# Altium PCB DQLA-Q.PcbDoc (part 2 of 2)
Units mil, origin at the board's own origin, x right, y up, seen from the top; angles counter-clockwise.
Board outline 12390.02 x 2400.02 mil, 6 copper layers (Top Layer, Plane 1, Signal 1, Signal 2, Plane 2, Bottom Layer), stack 32.112 mil thick; 112 components, 227 nets, 639 pads, 315 vias.
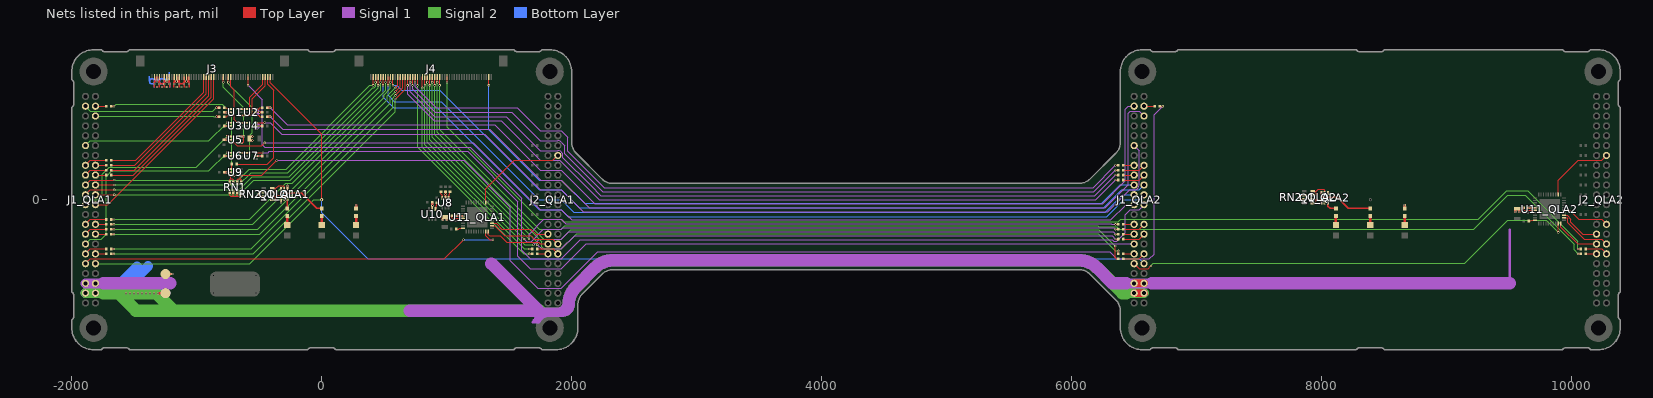
[diagram p6: the nets of this part, all layers, seen from the top]

## Via types
v1: diameter 18, hole 8, Top Layer to Bottom Layer, tented both sides, 315 vias

## Nets (pads, with @x,y where several pads share a name; then routed paths per layer and width w, separated by ;. In a path a pad name is that pad's centre, name@x,y a point inside that pad or via, vN(x,y) a via of type N, cw(c..) or ccw(c..) an arc to the next point about the centre after c; other vN are vias at no path point) (continued)
LIM-N3_QLA2: J2_QLA2.27 U11_QLA2.15 | length 384.8
  Top Layer w6: U11_QLA2.15@9941,-84.84 9984.84,-84.84 10057.48,-157.48 10240,-157.48 J2_QLA2.27@10279.37,-196.85
LIM-N4_QLA1: J2_QLA1.30 U11_QLA1.13 | length 485.4
  Top Layer w6: U11_QLA1.13@1361,-189.21 1395,-189.21 1440.79,-235 1674.41,-235 1715,-275.59 J2_QLA1.30@1810.63,-275.59
LIM-N4_QLA2: J2_QLA2.30 U11_QLA2.13 | length 336.8
  Top Layer w6: U11_QLA2.13@9941,-124.21 9963.9,-124.21 9995,-155.32 9995,-180 10090.59,-275.59 J2_QLA2.30@10200.63,-275.59
LIM-P1_QLA1: J2_QLA1.31 U11_QLA1.12 | length 588.6
  Top Layer w6: U11_QLA1.12@1361,-208.9 1385,-208.9 1466.1,-290 1675.04,-290 1700,-314.96 1850,-314.96 J2_QLA1.31@1889.37,-354.33
LIM-P1_QLA2: J2_QLA2.31 U11_QLA2.12 | length 446
  Top Layer w6: U11_QLA2.12@9941,-143.9 9963.9,-143.9 9970,-150 9970,-185 10099.96,-314.96 10240,-314.96 J2_QLA2.31@10279.37,-354.33
LIM-P2_QLA1: J2_QLA1.32 U11_QLA1.10 | length 531.8
  Top Layer w6: U11_QLA1.10@1333.58,-256 1333.58,-280 1343.58,-290 1430,-290 1480,-340 1735,-340 1749.33,-354.33 J2_QLA1.32@1810.63,-354.33
LIM-P2_QLA2: J2_QLA2.32 U11_QLA2.10 | length 371.6
  Top Layer w6: U11_QLA2.10@9913.58,-191 9913.58,-219.79 10048.12,-354.33 J2_QLA2.32@10200.63,-354.33
LIM-P3#_QLA1: J2_QLA1.33 R28_QLA1.1 | length 180.7
  Top Layer w8: R28_QLA1.1@1725,-393.7 1850,-393.7 J2_QLA1.33@1889.37,-433.07
LIM-P3#_QLA2: J2_QLA2.33 R28_QLA2.1 | length 180.7
  Top Layer w8: R28_QLA2.1@10115,-393.7 10240,-393.7 J2_QLA2.33@10279.37,-433.07
LIM-P3_QLA1: J4.29 R28_QLA1.2 | length 1779.1
  Top Layer w8: v1@806.1,900 J4.29@806.1,982.5 ; v1(1660.94,-393.7) R28_QLA1.2@1685,-393.7
  Signal 2 w8: v1@806.1,900 806.1,418.9 1618.7,-393.7 v1(1660.94,-393.7)
  other v1: 806.1,895
LIM-P3_QLA2: J4.19 R28_QLA2.2 | length 10118.7
  Top Layer w8: v1(1002.95,940) J4.19@1002.95,982.5 ; v1(10050.94,-393.7) R28_QLA2.2@10075,-393.7
  Signal 2 w8: v1(1002.95,940) 1002.95,579.57 1740,-157.48 1917.56,-157.48 1936.08,-176 6374,-176 6392.52,-157.48 9252.52,-157.48 9480,70 9650,70 10050.94,-330.94 v1(10050.94,-393.7)
LIM-P4#_QLA1: J2_QLA1.34 R29_QLA1.1 | length 85.6
  Top Layer w8: R29_QLA1.1@1725,-433.07 J2_QLA1.34@1810.63,-433.07
LIM-P4#_QLA2: J2_QLA2.34 R29_QLA2.1 | length 85.6
  Top Layer w8: R29_QLA2.1@10115,-433.07 J2_QLA2.34@10200.63,-433.07
LIM-P4_QLA1: J4.31 R29_QLA1.2 | length 1835.1
  Top Layer w8: v1(766.73,915) J4.31@766.73,982.5 ; v1(1660.94,-433.07) R29_QLA1.2@1685,-433.07
  Signal 2 w8: v1(766.73,915) 766.73,418.27 1618.07,-433.07 v1(1660.94,-433.07)
LIM-P4_QLA2: J4.22 R29_QLA2.2 | length 10241.1
  Top Layer w8: v1(943.9,915) J4.22@943.9,982.5 ; v1(10050.94,-433.07) R29_QLA2.2@10075,-433.07
  Signal 2 w8: v1(943.9,915) 943.9,559.25 1739.37,-236.22 1917.56,-236.22 1945.78,-208 6210,-208 6218.53,-216.54 6361.53,-216.54 6381.22,-236.22 9218.78,-236.22 9490,35 9630,35 10020,-355 10020,-402.13 v1(10050.94,-433.07)
MISO1: J3.3 R3.2 | length 982.7
  Top Layer w8: R3.2@-680,285 -435,285 -385,335 -385,875 -432.09,922.09 J3.3@-432.09,982.5
MISO1_QLA1: R9_QLA1.2 RN1.3 RN1.4 U9.6 | length 1649.5
  Top Layer w8: R9_QLA1.2@-1685,748.03 v1(-1660.94,748.03) ; RN1.4@-737.5,135.76 RN1.4@-737.24,135.5 -737.24,158.75 -729.16,166.83 ; U9.6@-729,194.41 -729.16,194.25 -729.16,166.83 ; RN1.3@-705.75,135.5 -705.75,158.75 -713.83,166.83 -729.16,166.83
  Top Layer w15: U9.6@-729,194.41 v1@-700.5,194.41
  Signal 2 w8: v1(-1660.94,748.03) -1643.98,765 -795,765 -720,690 -720,212.41 v1(-700.5,192.91)
MISO1_QLA2: R9_QLA2.2 RN1.1 RN1.2 U9.1 | length 9543.4
  Top Layer w8: RN1.2@-674.25,135.5 -674.25,158.75 -666.17,166.83 -650.84,166.83 ; RN1.1@-642.76,135.5 -642.76,158.75 -650.84,166.83 ; v1(-360,314) -479.59,194.41 U9.1@-651,194.41 -650.84,194.25 -650.84,166.83 ; R9_QLA2.2@6705,748.03 v1(6729.06,748.03)
  Signal 1 w8: v1(-360,314) 1136,314 1510,-60 1510,-488.74 1729.92,-708.66 1917.56,-708.66 2210.22,-416 6306,-416 6362.44,-472.44 6622.56,-472.44 6660,-435 6660,678.98 v1(6729.06,748.03)
MISO-C1_QLA1: J4.42 R15_QLA1.2 | length 2789.5
  Top Layer w8: R15_QLA1.2@-1685,-196.85 v1(-1660.94,-196.85) ; v1(550.2,940) J4.42@550.2,982.5
  Signal 2 w8: v1(-1660.94,-196.85) -551.65,-196.85 -349.8,5 -315,5 500,820 500,840 550.2,890.2 v1(550.2,940)
MISO-C1_QLA2: J4.27 R15_QLA2.2 | length 6432.5
  Top Layer w8: v1(845.47,940) J4.27@845.47,982.5 ; v1(6350.94,-235.74) R15_QLA2.2@6375,-235.74
  Signal 1 w8: v1(1620,-315.04) 1639.96,-335 1675,-335 1773.78,-236.22 1917.56,-236.22 1929.78,-224 6339.2,-224 v1(6350.94,-235.74)
  Signal 2 w8: v1(845.47,940) 845.47,459.49 v1(1620,-315.04)
MISO-C2_QLA1: J4.44 R14_QLA1.2 | length 2730.5
  Top Layer w8: R14_QLA1.2@-1685,-157.48 v1(-1660.94,-157.48) ; v1(510.83,940) J4.44@510.83,982.5
  Signal 2 w8: v1(-1660.94,-157.48) -575,-157.48 -287.52,130 -235,130 510.83,875.83 v1(510.83,940)
MISO-C2_QLA2: J4.26 R14_QLA2.2 | length 6446.6
  Top Layer w8: v1(865.16,915) J4.26@865.16,982.5 ; v1(6350.94,-196.85) R14_QLA2.2@6375,-196.85
  Signal 1 w8: v1(1659.37,-314.96) 1659.37,-275.67 1777.56,-157.48 1917.56,-157.48 1952.08,-192 6317,-192 6321.85,-196.85 v1(6350.94,-196.85)
  Signal 2 w8: v1(865.16,915) 865.16,479.25 v1(1659.37,-314.96)
MISO-C3_QLA1: J4.38 R17_QLA1.2 | length 2955.8
  Top Layer w8: R17_QLA1.2@-1685,-275.59 v1(-1660.94,-275.59) ; v1(589.57,865) 628.94,904.37 J4.38@628.94,982.5 628.94,940
  Signal 2 w8: v1(-1660.94,-275.59) -495.59,-275.59 550,770 550,825.43 v1(589.57,865)
MISO-C3_QLA2: J4.25 R17_QLA2.2 | length 6409.4
  Top Layer w8: v1(884.84,940) J4.25@884.84,982.5 ; v1(6350.94,-314.96) R17_QLA2.2@6375,-314.96
  Signal 1 w8: v1(1725,-360) 1758.7,-393.7 1917.56,-393.7 2023.26,-288 6323.98,-288 v1(6350.94,-314.96)
  Signal 2 w8: v1(884.84,940) 884.84,499.25 1725,-340.9 v1(1725,-360)
MISO-C4_QLA1: J4.39 R16_QLA1.2 | length 2924.1
  Top Layer w8: R16_QLA1.2@-1685,-236.22 v1(-1660.94,-236.22) ; v1(589.57,895) 609.25,914.68 J4.39@609.25,982.5 609.25,915
  Signal 2 w8: v1(-1660.94,-236.22) -511.22,-236.22 525,800 525,830.43 v1(589.57,895)
MISO-C4_QLA2: J4.28 R16_QLA2.2 | length 6474.7
  Top Layer w8: v1@825.79,920 J4.28@825.79,982.5 ; v1(6350.94,-275.59) R16_QLA2.2@6375,-275.59
  Signal 1 w8: v1(1695,-360) 1740.04,-314.96 1917.56,-314.96 1976.52,-256 6331.35,-256 v1(6350.94,-275.59)
  Signal 2 w8: v1@825.79,920 825.79,439.26 1625.04,-360 v1(1695,-360)
  other v1: 825.79,915
MISO-P1_QLA1: J3.27 R12_QLA1.2 | length 1177.2
  Top Layer w8: R12_QLA1.2@-1685,236.22 -1501.26,236.22 -1473.74,263.74 -925.06,812.42 -904.53,832.95 J3.27@-904.53,982.5
MISO-P1_QLA2: J4.34 R12_QLA2.2 | length 6331.9
  Top Layer w8: v1(707.68,940) J4.34@707.68,982.5 ; v1(6350.94,196.85) R12_QLA2.2@6375,196.85
  Signal 1 w8: v1(707.68,940) 707.68,862.32 905,665 1476.22,665 1747.52,393.7 1889.37,393.7 cw(c1889.37,354.33) 1928.74,354.33 1928.74,337.26 2151.95,114.06 ; v1(6350.94,196.85) 6186.09,32 2234.01,32 ; 2151.95,114.06 2234.01,32 ; 2151.95,114.06 2234.01,32
MISO-P2_QLA1: J3.26 R13_QLA1.2 | length 1220.7
  Top Layer w8: R13_QLA1.2@-1685,196.85 -1508.1,196.85 -884.84,820.11 J3.26@-884.84,982.5
MISO-P2_QLA2: J4.35 R13_QLA2.2 | length 6241.5
  Top Layer w8: v1(687.99,915) J4.35@687.99,982.5 ; v1(6350.94,157.48) R13_QLA2.2@6375,157.48
  Signal 1 w8: v1(687.99,915) 687.99,842.01 900,630 1435,630 1750.04,314.96 1905.79,314.96 2220.75,0 6193.46,0 v1(6350.94,157.48)
MISO-P3_QLA1: J3.29 R10_QLA1.2 | length 1090.2
  Top Layer w8: R10_QLA1.2@-1685,314.96 -1487.57,314.96 -943.9,858.63 J3.29@-943.9,982.5
MISO-P3_QLA2: J4.32 R10_QLA2.2 | length 6181.9
  Top Layer w8: v1(747.05,940) J4.32@747.05,982.5 ; v1(6350.94,275.59) R10_QLA2.2@6375,275.59
  Signal 1 w8: v1(747.05,940) 747.05,902.95 915,735 1563.7,735 1747.52,551.18 1917.56,551.18 1970,498.74 1970,386.51 2260.51,96 6171.35,96 v1(6350.94,275.59)
MISO-P4_QLA1: J3.28 R11_QLA1.2 | length 1133.7
  Top Layer w8: R11_QLA1.2@-1685,275.59 -1494.41,275.59 -924.21,845.79 J3.28@-924.21,982.5
MISO-P4_QLA2: J4.33 R11_QLA2.2 | length 6195.4
  Top Layer w8: v1(727.36,915) J4.33@727.36,982.5 ; v1(6350.94,236.22) R11_QLA2.2@6375,236.22
  Signal 1 w8: v1(727.36,915) 727.36,882.64 910,700 1519.96,700 1747.52,472.44 1889.37,472.44 cw(c1889.37,433.07) 1917.21,460.91 1945,433.12 1945,366.26 2247.26,64 6178.72,64 v1(6350.94,236.22)
MOSI1: J3.5 U1.3 U2.1 | length 370.3
  Top Layer w8: U1.3@-651,725.59 -584.41,725.59 -575,735 -575,820 -471.46,923.54 J3.5@-471.46,982.5
MOSI1_QLA1: J1_QLA1.4 R1.2 | length 1097
  Top Layer w18: v1(-842.5,736) R1.2@-820,736
  Signal 2 w8: J1_QLA1.4@-1889.37,748.03 -1850,708.66 -869.84,708.66 v1(-842.5,736)
MOSI1_QLA2: J1_QLA2.4 R4.2 | length 7912.5
  Top Layer w18: R4.2@-435,736 v1(-412.5,736)
  Signal 1 w8: v1(-412.5,736) -276.5,600 1383.74,600 1747.52,236.22 1917.56,236.22 2185.78,-32 6248,-32 6430,150 6430,723.03 6455,748.03 J1_QLA2.4@6500.63,748.03
MOSI_QLA1: J1_QLA1.23 J3.25 | length 1471.4
  Top Layer w8: J1_QLA1.23@-1810.63,-39.37 -1711.79,-39.37 -865.16,807.27 J3.25@-865.16,982.5
MOSI_QLA2: J1_QLA2.23 J3.11 | length 8541.3
  Top Layer w8: v1(-589.57,915) J3.11@-589.57,982.5
  Signal 1 w8: v1(-589.57,915) -475,800.43 -475,440 -455,420 -215,420 1190,420 1600,10 1600,-405 1667.44,-472.44 1917.56,-472.44 2070,-320 6325,-320 6338.96,-333.96 6361.04,-333.96 6430,-265 6430,-120 6471.26,-78.74 6540,-78.74 J1_QLA2.23@6579.37,-39.37
MV-GOOD_QLA1: J2_QLA1.13 U11_QLA1.22 | length 798.3
  Top Layer w6: U11_QLA1.22@1313.9,-24 1313.9,88.86 1540,314.96 1850,314.96 J2_QLA1.13@1889.37,354.33
MV-GOOD_QLA2: J2_QLA2.13 U11_QLA2.22 | length 581.4
  Top Layer w6: U11_QLA2.22@9893.9,41 9893.9,153.86 10055,314.96 10240,314.96 J2_QLA2.13@10279.37,354.33
NetD1_QLA1_2: D1_QLA1.2 R31_QLA1.1 | length 73
  Top Layer w20: D1_QLA1.2@-275,-203 R31_QLA1.1@-275,-130
NetD1_QLA2_2: D1_QLA2.2 R31_QLA2.1 | length 73
  Top Layer w20: D1_QLA2.2@8115,-203 R31_QLA2.1@8115,-130
NetD2_QLA1_2: D2_QLA1.2 R32_QLA1.1 | length 73
  Top Layer w20: D2_QLA1.2@0,-203 R32_QLA1.1@0,-130
NetD2_QLA2_2: D2_QLA2.2 R32_QLA2.1 | length 73
  Top Layer w20: D2_QLA2.2@8390,-203 R32_QLA2.1@8390,-130
NetD3_QLA1_2: D3_QLA1.2 R33_QLA1.1 | length 73
  Top Layer w20: D3_QLA1.2@275,-203 R33_QLA1.1@275,-130
NetD3_QLA2_2: D3_QLA2.2 R33_QLA2.1 | length 73
  Top Layer w20: D3_QLA2.2@8665,-203 R33_QLA2.1@8665,-130
NetJ1_QLA1_3: J1_QLA1.3 R9_QLA1.1 | length 85.6
  Top Layer w8: J1_QLA1.3@-1810.63,748.03 R9_QLA1.1@-1725,748.03
NetJ1_QLA1_15: J1_QLA1.15 R11_QLA1.1 | length 85.6
  Top Layer w8: J1_QLA1.15@-1810.63,275.59 R11_QLA1.1@-1725,275.59
NetJ1_QLA1_16: J1_QLA1.16 R10_QLA1.1 | length 180.7
  Top Layer w8: J1_QLA1.16@-1889.37,275.59 -1850,314.96 R10_QLA1.1@-1725,314.96
NetJ1_QLA1_17: J1_QLA1.17 R13_QLA1.1 | length 85.6
  Top Layer w8: J1_QLA1.17@-1810.63,196.85 R13_QLA1.1@-1725,196.85
NetJ1_QLA1_18: J1_QLA1.18 R12_QLA1.1 | length 180.7
  Top Layer w8: J1_QLA1.18@-1889.37,196.85 -1850,236.22 R12_QLA1.1@-1725,236.22
NetJ1_QLA1_27: J1_QLA1.27 R15_QLA1.1 | length 85.6
  Top Layer w8: J1_QLA1.27@-1810.63,-196.85 R15_QLA1.1@-1725,-196.85
NetJ1_QLA1_28: J1_QLA1.28 R14_QLA1.1 | length 180.7
  Top Layer w8: J1_QLA1.28@-1889.37,-196.85 -1850,-157.48 R14_QLA1.1@-1725,-157.48
NetJ1_QLA1_29: J1_QLA1.29 R17_QLA1.1 | length 85.6
  Top Layer w8: J1_QLA1.29@-1810.63,-275.59 R17_QLA1.1@-1725,-275.59
NetJ1_QLA1_30: J1_QLA1.30 R16_QLA1.1 | length 180.7
  Top Layer w8: J1_QLA1.30@-1889.37,-275.59 -1850,-236.22 R16_QLA1.1@-1725,-236.22
NetJ1_QLA1_33: J1_QLA1.33 R19_QLA1.1 | length 85.6
  Top Layer w8: J1_QLA1.33@-1810.63,-433.07 R19_QLA1.1@-1725,-433.07
NetJ1_QLA1_34: J1_QLA1.34 R18_QLA1.1 | length 180.7
  Top Layer w8: J1_QLA1.34@-1889.37,-433.07 -1850,-393.7 R18_QLA1.1@-1725,-393.7
NetJ1_QLA2_3: J1_QLA2.3 R9_QLA2.1 | length 85.6
  Top Layer w8: J1_QLA2.3@6579.37,748.03 R9_QLA2.1@6665,748.03
NetJ1_QLA2_15: J1_QLA2.15 R11_QLA2.1 | length 180.7
  Top Layer w8: R11_QLA2.1@6415,236.22 6540,236.22 J1_QLA2.15@6579.37,275.59
NetJ1_QLA2_16: J1_QLA2.16 R10_QLA2.1 | length 85.6
  Top Layer w8: R10_QLA2.1@6415,275.59 J1_QLA2.16@6500.63,275.59
NetJ1_QLA2_17: J1_QLA2.17 R13_QLA2.1 | length 180.7
  Top Layer w8: R13_QLA2.1@6415,157.48 6540,157.48 J1_QLA2.17@6579.37,196.85
NetJ1_QLA2_18: J1_QLA2.18 R12_QLA2.1 | length 85.6
  Top Layer w8: R12_QLA2.1@6415,196.85 J1_QLA2.18@6500.63,196.85
NetJ1_QLA2_27: J1_QLA2.27 R15_QLA2.1 | length 180.7
  Top Layer w8: R15_QLA2.1@6415,-236.22 6540,-236.22 J1_QLA2.27@6579.37,-196.85
NetJ1_QLA2_28: J1_QLA2.28 R14_QLA2.1 | length 85.6
  Top Layer w8: R14_QLA2.1@6415,-196.85 J1_QLA2.28@6500.63,-196.85
NetJ1_QLA2_29: J1_QLA2.29 R17_QLA2.1 | length 180.7
  Top Layer w8: R17_QLA2.1@6415,-314.96 6540,-314.96 J1_QLA2.29@6579.37,-275.59
NetJ1_QLA2_30: J1_QLA2.30 R16_QLA2.1 | length 85.6
  Top Layer w8: R16_QLA2.1@6415,-275.59 J1_QLA2.30@6500.63,-275.59
NetJ1_QLA2_33: J1_QLA2.33 R19_QLA2.1 | length 180.7
  Top Layer w8: R19_QLA2.1@6415,-472.44 6540,-472.44 J1_QLA2.33@6579.37,-433.07
NetJ1_QLA2_34: J1_QLA2.34 R18_QLA2.1 | length 85.6
  Top Layer w8: R18_QLA2.1@6415,-433.07 J1_QLA2.34@6500.63,-433.07
NetQ1_QLA1_2: Q1_QLA1.2 RN2_QLA1.7 RN2_QLA1.8 | length 183.9
  Top Layer w6: RN2_QLA1.7@-394.5,60.75 -372.24,60.75 -365.75,67.24 -365.75,92.24 ; RN2_QLA1.8@-394.5,92.24 -365.75,92.24 ; Q1_QLA1.2@-300,84 -300,105 -308,113 -344.99,113 -365.75,92.24
NetQ1_QLA1_3: Q1_QLA1.3 R32_QLA1.2 | length 403.1
  Top Layer w12: Q1_QLA1.3@-325.59,84 -325.59,60.59 -315,50 -160,50 -40,-70 R32_QLA1.2@0,-70
NetQ1_QLA1_5: Q1_QLA1.5 RN2_QLA1.5 RN2_QLA1.6 | length 177.6
  Top Layer w6: RN2_QLA1.5@-394.5,-2.24 -372.24,-2.24 -365.75,4.25 -365.75,29.25 ; RN2_QLA1.6@-394.5,29.25 -365.75,29.25 ; Q1_QLA1.5@-300,6 -300,27 -308,35 -360,35 -365.75,29.25
NetQ1_QLA1_6: Q1_QLA1.6 R31_QLA1.2 | length 77.1
  Top Layer w12: R31_QLA1.2@-275,-70 -276,-69 -274.41,-67.41 Q1_QLA1.6@-274.41,6
NetQ1_QLA2_2: Q1_QLA2.2 RN2_QLA2.7 RN2_QLA2.8 | length 181.8
  Top Layer w6: RN2_QLA2.7@7930.5,35.75 7952.76,35.75 7959.25,42.24 7959.25,67.24 ; RN2_QLA2.8@7930.5,67.24 7959.25,67.24 ; Q1_QLA2.2@8025,54 8025,75 8017,83 7975.01,83 7959.25,67.24
NetQ1_QLA2_3: Q1_QLA2.3 R32_QLA2.2 | length 455.7
  Top Layer w12: Q1_QLA2.3@7999.41,54 7999.41,30.59 8010,20 8125,20 8215,-70 R32_QLA2.2@8390,-70
NetQ1_QLA2_5: Q1_QLA2.5 RN2_QLA2.5 RN2_QLA2.6 | length 174.9
  Top Layer w6: RN2_QLA2.5@7930.5,-27.24 7952.76,-27.24 7959.25,-20.75 7959.25,4.25 ; RN2_QLA2.6@7930.5,4.25 7959.25,4.25 ; Q1_QLA2.5@8025,-24 8025,-3 8017.75,4.25 7959.25,4.25
NetQ1_QLA2_6: Q1_QLA2.6 R31_QLA2.2 | length 100.2
  Top Layer w12: Q1_QLA2.6@8050.59,-24 8050.59,-50.59 8069.41,-69.41 8115.59,-69.41 R31_QLA2.2@8115,-70
NetR1_1: R1.1 U1.4 | length 55.3
  Top Layer w8: R1.1@-780,736 -761,736 -750.59,725.59 U1.4@-729,725.59
NetR2_1: R2.1 U1.6 | length 55.3
  Top Layer w8: R2.1@-780,664 -761,664 -750.59,674.41 U1.6@-729,674.41
NetR3_1: R3.1 U9.4 | length 40
  Top Layer w8: U9.4@-720,245 R3.1@-720,285
NetR4_1: R4.1 U2.6 | length 55.3
  Top Layer w8: U2.6@-526,725.59 -504.41,725.59 -494,736 R4.1@-475,736
NetR5_1: R5.1 U2.4 | length 55.3
  Top Layer w8: U2.4@-526,674.41 -504.41,674.41 -494,664 R5.1@-475,664
NetR6_1: R6.1 U10.4 | length 55.3
  Top Layer w8: U10.4@910.59,-76 910.59,-54.41 921,-44 R6.1@921,-25
NetR7_1: R7.1 U8.6 | length 55.3
  Top Layer w8: R7.1@954,65 954,46 964.41,35.59 U8.6@964.41,14
NetR8_1: R8.1 U8.4 | length 55.3
  Top Layer w8: U8.4@1015.59,14 1015.59,35.59 1026,46 R8.1@1026,65
NetR30_QLA1_2: R30_QLA1.2 U11_QLA1.40 | length 54.2
  Top Layer w8: R30_QLA1.2@1077.5,-235 1095,-235 1101.42,-228.58 U11_QLA1.40@1129,-228.58
NetR30_QLA2_2: R30_QLA2.2 U11_QLA2.40 | length 54.2
  Top Layer w8: R30_QLA2.2@9657.5,-170 9675,-170 9681.42,-163.58 U11_QLA2.40@9709,-163.58
NetR34_QLA1_1: R34_QLA1.1 U11_QLA1.36 | length 106.8
  Top Layer w6: R34_QLA1.1@1038.58,-129.84 1038.58,-143.58 1044.84,-149.84 U11_QLA1.36@1129,-149.84
NetR34_QLA2_1: R34_QLA2.1 U11_QLA2.36 | length 106.8
  Top Layer w6: R34_QLA2.1@9618.58,-64.84 9618.58,-78.58 9624.84,-84.84 U11_QLA2.36@9709,-84.84
OUT1_QLA1: J1_QLA1.22 J4.47 | length 2782
  Top Layer w8: J1_QLA1.22@-1889.37,39.37 -1850,78.74 v1(-1660,78.74) ; v1(451.77,915) J4.47@451.77,982.5
  Signal 2 w8: v1(-1660,78.74) -661.26,78.74 -555,185 -260,185 451.77,896.77 v1(451.77,915)
OUT1_QLA2: J1_QLA2.22 J4.43 | length 6562.9
  Top Layer w8: v1(530.51,915) J4.43@530.51,982.5
  Bottom Layer w8: v1(530.51,915) 530.51,834.49 580,785 955,785 1740,0 1917.56,0 2017.56,-100 6269,-100 6408.37,39.37 J1_QLA2.22@6500.63,39.37
OUT2_QLA1: J1_QLA1.21 J4.46 | length 2734.9
  Top Layer w8: J1_QLA1.21@-1810.63,39.37 v1(-1660,39.37) ; v1(471.46,940) J4.46@471.46,982.5
  Signal 2 w8: v1(-1660,39.37) -660.63,39.37 -545,155 -250,155 471.46,876.46 v1(471.46,940)
OUT2_QLA2: J1_QLA2.21 J4.45 | length 6719.2
  Top Layer w8: v1(491.14,915) J4.45@491.14,982.5
  Bottom Layer w8: v1(491.14,915) 491.14,818.86 575,735 926.26,735 1740,-78.74 1917.56,-78.74 1973.82,-135 6282,-135 6417,0 6540,0 J1_QLA2.21@6579.37,39.37
OUT3_QLA1: J1_QLA1.20 J4.49 | length 2699.4
  Top Layer w8: J1_QLA1.20@-1889.37,118.11 -1850,157.48 v1(-1660,157.48) ; v1(412.4,915) J4.49@412.4,982.5
  Signal 2 w8: v1(-1660,157.48) -667.52,157.48 -580,245 -285,245 385,915 v1(412.4,915)
OUT3_QLA2: J1_QLA2.20 J4.2 | length 5891.3
  Top Layer w8: v1(1337.6,915) J4.2@1337.6,982.5
  Bottom Layer w8: v1(1337.6,915) 1337.6,559.88 1740,157.48 1917.56,157.48 2105.04,-30 6243,-30 6391.11,118.11 J1_QLA2.20@6500.63,118.11
OUT4_QLA1: J1_QLA1.19 J4.48 | length 2644.9
  Top Layer w8: J1_QLA1.19@-1810.63,118.11 v1(-1660,118.11) ; v1(432.09,940) J4.48@432.09,982.5
  Signal 2 w8: v1(-1660,118.11) -661.89,118.11 -565,215 -270,215 410,895 420,895 432.09,907.09 v1(432.09,940)
OUT4_QLA2: J1_QLA2.19 J4.41 | length 6558.8
  Top Layer w8: v1(569.88,915) J4.41@569.88,982.5
  Bottom Layer w8: v1(569.88,915) 600,915 640,875 943.74,875 1740,78.74 1917.56,78.74 2061.3,-65 6256,-65 6399.74,78.74 6540,78.74 J1_QLA2.19@6579.37,118.11
PWR-EN_QLA1: J1_QLA1.36 U11_QLA1.9 | length 3441.3
  Top Layer w8: J1_QLA1.36@-1889.37,-511.81 -1850,-472.44 982.56,-472.44 v1(1135,-320) ; U11_QLA1.9@1313.9,-256 1313.9,-290 1343.9,-320 v1(1370,-320)
  Bottom Layer w8: v1(1135,-320) v1(1370,-320)
PWR-EN_QLA2: J1_QLA2.36 U11_QLA2.9 | length 3679.8
  Top Layer w6: v1(9893.9,-261.34) U11_QLA2.9@9893.9,-191
  Top Layer w8: J1_QLA2.36@6500.63,-511.81 6540,-551.18 6613.82,-551.18 v1(6635,-530)
  Signal 2 w8: v1(6635,-530) 6655,-510 9145,-510 9490,-165 9797.56,-165 v1(9893.9,-261.34)
Q1-SCLK: J1_QLA1.24 U5.4 | length 1497.6
  Top Layer w15: v1@-757.5,505.59 -745.91,505.59 ; v1@-756.72,508.49 -745.91,505.59 ; -745.86,505.58 -745.91,505.59 ; U5.4@-729,505.59 -745.91,505.59
  Signal 2 w8: J1_QLA1.24@-1889.37,-39.37 -1850,0 -1790,0 -1755,35 -1755,205 -1700,260 -1004.59,260 v1(-757.5,507.09)
Q1-SCLK1: J1_QLA1.5 R2.2 | length 992.8
  Top Layer w18: v1(-842.5,664) R2.2@-820,664
  Signal 2 w8: J1_QLA1.5@-1810.63,669.29 -869.29,669.29 -864,664 v1(-842.5,664)
Q1-SCLK-CUR: J1_QLA1.32 U6.4 | length 1744
  Top Layer w15: v1@-757.5,375.59 -745.91,375.59 ; v1@-756.72,378.49 -745.91,375.59 ; -745.86,375.58 -745.91,375.59 ; U6.4@-729,375.59 -745.91,375.59
  Signal 2 w8: J1_QLA1.32@-1889.37,-354.33 -1850,-314.96 -1764.96,-314.96 -1725,-275 -1725,185 -1680,230 -904.59,230 v1(-757.5,377.09)
Q1-SCLK-POT: J1_QLA1.12 U3.4 | length 1247.8
  Top Layer w15: v1@-757.5,615.59 -745.91,615.59 ; v1@-756.72,618.49 -745.91,615.59 ; -745.86,615.58 -745.91,615.59 ; U3.4@-729,615.59 -745.91,615.59
  Signal 2 w8: J1_QLA1.12@-1889.37,433.07 -1850,472.44 -902.15,472.44 v1(-757.5,617.09)
Q1-TEMP1: J4.37 R18_QLA1.2 | length 3067.2
  Top Layer w8: R18_QLA1.2@-1685,-393.7 v1(-1660.94,-393.7) ; v1(589.57,835) 648.62,894.06 J4.37@648.62,982.5 648.62,915
  Signal 2 w8: v1(-1660.94,-393.7) -563.7,-393.7 567.28,737.28 567.28,812.72 v1(589.57,835)
Q1-TEMP2: J4.36 R19_QLA1.2 | length 3098.8
  Top Layer w8: R19_QLA1.2@-1685,-433.07 v1(-1660.94,-433.07) ; v1(589.57,805) 668.31,883.74 J4.36@668.31,982.5 668.31,940
  Signal 2 w8: v1(-1660.94,-433.07) -548.07,-433.07 589.57,704.57 v1(589.57,805)
Q2-SCLK: J1_QLA2.24 U5.6 | length 7557.3
  Top Layer w8: U5.6@-729,454.41 -699.41,454.41 -675,430 -481,430 v1(-456,455)
  Signal 1 w8: v1@-458.5,455 v1(-456,455) 1213.74,455 1747.48,-78.74 1917.56,-78.74 1998.82,-160 6315,-160 6435.63,-39.37 J1_QLA2.24@6500.63,-39.37
Q2-SCLK1: J1_QLA2.5 R5.2 | length 7988.3
  Top Layer w18: R5.2@-435,664 v1(-412.5,664)
  Signal 1 w8: v1(-412.5,664) -313.5,565 1343.74,565 1751.26,157.48 1917.56,157.48 2139.04,-64 6271,-64 6455,120 6455,693.66 6470,708.66 6540,708.66 J1_QLA2.5@6579.37,669.29
Q2-SCLK-CUR: J1_QLA2.32 U7.6 | length 7764.6
  Top Layer w8: U7.6@-526,375.59 -524.5,377.09 v1(-470,377.09)
  Signal 1 w8: v1@-475,377.09 v1(-470,377.09) -427.91,377.09 -419,386 1169,386 1570,-15 1570,-453.74 1667.44,-551.18 1917.56,-551.18 2116.74,-352 6498.3,-352 J1_QLA2.32@6500.63,-354.33
Q2-SCLK-POT: J1_QLA2.12 U4.6 | length 7790.7
  Top Layer w8: U4.6@-526,615.59 -524.5,617.09 v1(-456,617.09)
  Signal 1 w8: v1@-458.5,617.09 v1(-456,617.09) -412.09,617.09 -320,525 1303.74,525 1750,78.74 1917.56,78.74 2092.3,-96 6289,-96 6463.7,78.7 6499.88,78.7 ccw(c6500.63,118.11) 6540,116.22 ccw(c6500.63,118.11) 6540,120 6540,393.7 J1_QLA2.12@6500.63,433.07
Q2-TEMP1: J4.23 R19_QLA2.2 | length 6430.3
  Top Layer w8: v1(924.21,940) J4.23@924.21,982.5 ; v1(6350,-371) 6350.94,-371.94 6350.94,-465.94 6357.44,-472.44 R19_QLA2.2@6375,-472.44
  Signal 2 w8: v1(924.21,940) 924.21,539.25 1778.43,-314.96 1917.56,-314.96 1992.52,-240 6219,-240 v1(6350,-371)
Q2-TEMP2: J4.24 R18_QLA2.2 | length 6465.8
  Top Layer w8: v1(904.53,915) J4.24@904.53,982.5 ; R18_QLA2.2@6375,-433.07 v1(6375,-409.02)
  Signal 2 w8: v1(904.53,915) 904.53,519.25 1760,-336.22 1760,-375 1778.7,-393.7 1917.56,-393.7 2039.26,-272 6212,-272 6349.02,-409.02 v1(6375,-409.02)
RELAY-ON: J1_QLA1.35 J1_QLA2.35 J3.2 pad.1@0,0 | length 10028.8
  Top Layer w8: J3.2@-412.4,982.5 -412.4,937.4 0,525 pad.1@0,0
  Signal 2 w8: J1_QLA1.35@-1810.63,-511.81 -576.81,-511.81 -65,0 pad.1@0,0
  Bottom Layer w8: pad.1@0,0 0,-105 367.44,-472.44 6540,-472.44 J1_QLA2.35@6579.37,-511.81
SCLK: J3.21 U5.1 U5.3 | length 659.5
  Top Layer w8: v1(-786.42,940) J3.21@-786.42,982.5 ; U5.1@-651,454.41 -630.59,454.41 -622.5,462.5 -622.5,505.59 v1(-622.5,507.09)
  Top Layer w15: U5.3@-651,505.59 -634.09,505.59 ; -634.14,505.58 -634.09,505.59 ; v1@-623.28,508.49 -634.09,505.59 ; v1@-622.5,505.59 -634.09,505.59
  Signal 2 w8: v1(-786.42,940) -786.42,901.42 -622.5,737.5 v1(-622.5,507.09)
SCLK1: J3.4 U1.1 U2.3 | length 436.5
  Top Layer w8: U1.1@-651,674.41 -572.64,674.41 -556.5,690.54 -556.5,808.5 -451.77,913.23 J3.4@-451.77,982.5
SCLK-CUR: J3.19 U6.3 U7.1 | length 768.9
  Top Layer w8: v1(-747.05,940) J3.19@-747.05,982.5 ; U6.3@-651,375.59 U7.1@-604,375.59
  Top Layer w15: U7.1@-604,375.59 v1@-575.5,375.59
  Signal 2 w8: v1(-747.05,940) -747.05,927.05 -555,735 -555,535 -575.5,514.5 v1(-575.5,377.09)
SCLK-POT: J3.18 U3.3 U4.1 | length 459.9
  Top Layer w8: J3.18@-727.36,982.5 -727.36,902.36 -700,875 -700,640 -675.59,615.59 U3.3@-651,615.59 U4.1@-604,615.59
VCC: J1_QLA1.41 J1_QLA1.42 J1_QLA2.41 J1_QLA2.42 J3.43 J3.44 J3.45 J3.47 J3.48 J3.49 pad.2@-1250,-748.03 | length 12102.6
  Top Layer w11: -1341.1,899 -1341.1,934.92 ccw(c-1357.28,947.5) -1337.6,953.22 J3.49@-1337.6,982.5 ; -1337.6,955 ccw(c-1327.76,955) v1@-1317.91,954.91 ; v1(-1317.91,947.5) v1@-1317.91,954.91 ; J3.48@-1317.91,982.5 v1@-1317.91,954.91 ; -1298.23,899 -1298.23,941.78 ; -1298.23,955 cw(c-1308.07,955) -1298.23,954.92 ; J3.47@-1298.23,982.5 -1298.23,954.92 ; -1258.86,899 v1(-1258.86,925) -1258.86,941.78 ; -1258.86,955 ccw(c-1249.02,955) v1@-1239.17,954.91 ; J3.45@-1258.86,982.5 -1258.86,953.22 cw(c-1278.54,947.5) -1258.86,941.78 ; v1(-1239.17,947.5) v1@-1239.17,954.91 ; J3.44@-1239.17,982.5 v1@-1239.17,954.91 ; -1219.49,955 cw(c-1229.33,955) -1219.49,954.88 ; J3.43@-1219.49,982.5 -1219.49,954.88 ; -1215.99,899 -1215.99,934.92 cw(c-1199.8,947.5) -1219.49,953.22 -1219.49,954.88 ; v1@-1317.91,954.91 ccw(c-1327.76,955) -1317.91,955 ccw(c-1308.07,955) v1@-1317.91,954.91 ; v1@-1317.91,954.91 ccw(c-1308.07,955) -1298.23,954.92 ; -1298.23,941.78 cw(c-1278.54,947.5) -1298.23,953.22 -1298.23,954.92 ; -1298.23,941.78 ccw(c-1278.54,947.5) -1278.54,927 ccw(c-1278.54,947.5) -1258.86,941.78 ; v1@-1239.17,954.91 cw(c-1229.33,955) -1239.17,955 cw(c-1249.02,955) v1@-1239.17,954.91 ; v1@-1239.17,954.91 ccw(c-1229.33,955) -1219.49,954.88
  Top Layer w18: v1(-1310,-748.03) pad.2@-1255,-748.03
  Top Layer w60: J1_QLA2.42@6500.63,-748.03 J1_QLA2.41@6579.37,-748.03
  Signal 2 w75: 1675,-899.27 1890.5,-899.27 ; 1963,-826.77 cw(c1890.5,-826.77) 1890.5,-899.27 ; 1987.5,-839.27 cw(c1927.5,-839.27) 1927.5,-899.27 1890.5,-899.27
  Signal 2 w80: J1_QLA1.42@-1889.37,-748.03 J1_QLA1.41@-1810.63,-748.03 -1746.97,-748.03 ; 6436.97,-748.03 J1_QLA2.42@6500.63,-748.03 J1_QLA2.41@6579.37,-748.03
  Signal 2 w100: -1746.97,-748.03 -1626.97,-748.03 ; -1185.53,-887.5 -1325,-748.03 v1(-1342,-748.03) v1(-1374,-748.03) v1(-1406,-748.03) v1(-1438,-748.03) v1(-1470,-748.03) v1(-1502,-748.03) v1(-1534,-748.03) v1(-1566,-748.03) -1626.97,-748.03 ; 1745,-887.5 -1487.5,-887.5 -1626.97,-748.03 ; 1975,-840 cw(c2175,-840) 2033.58,-698.58 2188.58,-543.58 cw(c2330,-685) 2330,-485 6060,-485 cw(c6060,-685) 6201.42,-543.58 6405.87,-748.03 6436.97,-748.03
  Bottom Layer w11: -1377.78,947.5 -1377.78,986.8 ; -1341.1,899 -1341.1,934.92 ; -1337.6,953.22 -1298.3,953.22 ; -1337.6,963.22 -1298.3,963.22 ; -1258.86,953.22 -1219.56,953.22 ; -1258.86,963.22 -1219.56,963.22 ; -1219.49,953.22 ccw(c-1199.8,947.5) -1215.99,934.92 -1215.99,899 ; -1219.49,953.23 -1219.49,1019.5 ; -1336.78,947.5 ccw(c-1357.28,947.5) -1336.78,947.5 ; -1258.04,947.5 ccw(c-1278.54,947.5) -1258.04,947.5
  Bottom Layer w80: J1_QLA1.42@-1889.37,-748.03 J1_QLA1.41@-1810.63,-748.03 -1690.63,-748.03 ; -1600.63,-743.03 -1388.5,-530.9 ; -1478.5,-535.9 -1690.63,-748.03 ; -1250,-748.03 v1(-1310,-748.03) v1(-1342,-748.03) v1(-1374,-748.03) v1(-1406,-748.03) v1(-1438,-748.03) v1(-1470,-748.03) v1(-1502,-748.03) v1(-1534,-748.03) v1(-1566,-748.03) -1690.63,-748.03
  other v1: -1317.91,902.5 -1278.54,902.5 -1239.17,902.5 -1337.6,925 -1298.23,925 -1219.49,925
VCC3: C1.1 C2.1 C3.1 C4.1 C5.1 C6.1 C7.1 C8.1 C9.1 C10.1 C11.1 C12_QLA1.1 C12_QLA2.1 C13_QLA1.1 C13_QLA2.1 J1_QLA1.39 J1_QLA1.40 J1_QLA2.39 J1_QLA2.40 J3.35 J3.36 J3.37 J3.39 J3.40 J3.41 pad.2@-1250,-595 Q1_QLA1.1 Q1_QLA1.4 Q1_QLA2.1 Q1_QLA2.4 R33_QLA1.2 R33_QLA2.2 RN1.5 RN1.6 RN1.7 RN1.8 RN2_QLA1.2 RN2_QLA1.3 RN2_QLA2.2 RN2_QLA2.3 U1.5 U2.5 U3.5 U4.5 U5.5 U6.5 U7.5 U8.5 U9.5 U10.5 U11_QLA1.35 U11_QLA2.35 | length 13363.5
  Top Layer w8: RN1.5@-737.24,64.5 -737.24,37.24 -729.5,29.5 -705.75,29.5 ; RN1.6@-705.75,64.5 -705.75,29.5 ; RN1.7@-674.25,64.5 -674.25,29.5 ; RN1.8@-642.76,64.5 v1(-642.76,29.5) -674.25,29.5 ; RN2_QLA1.3@-465.5,29.25 -495.25,29.25 v1(-511,45) -495.25,60.75 RN2_QLA1.2@-465.5,60.75 ; RN2_QLA2.3@7859.5,4.25 7830.75,4.25 v1(7815,20) 7830.75,35.75 RN2_QLA2.2@7859.5,35.75 ; -705.75,29.5 -674.25,29.5
  Top Layer w11: -1183.62,899 -1183.62,934.92 ccw(c-1199.8,947.5) -1180.12,953.22 J3.41@-1180.12,982.5 ; -1180.12,955 ccw(c-1170.28,955) v1@-1160.43,954.91 ; v1(-1160.43,947.5) v1@-1160.43,954.91 ; J3.40@-1160.43,982.5 v1@-1160.43,954.91 ; -1140.75,899 -1140.75,941.78 ; -1140.75,955 cw(c-1150.59,955) -1140.75,954.92 ; J3.39@-1140.75,982.5 -1140.75,954.92 ; -1101.38,899 v1(-1101.38,925) -1101.38,941.78 ; -1101.38,955 ccw(c-1091.53,955) v1@-1081.69,954.91 ; J3.37@-1101.38,982.5 -1101.38,953.22 cw(c-1121.06,947.5) -1101.38,941.78 ; v1(-1081.69,947.5) v1@-1081.69,954.91 ; J3.36@-1081.69,982.5 v1@-1081.69,954.91 ; -1062.01,955 cw(c-1071.85,955) -1062.01,954.88 ; J3.35@-1062.01,982.5 -1062.01,954.88 ; -1058.51,899 -1058.51,934.92 cw(c-1042.32,947.5) -1062.01,953.22 -1062.01,954.88 ; v1(1099,-130.16) U11_QLA1.35@1129,-130.16 ; v1(9679,-65.16) U11_QLA2.35@9709,-65.16 ; v1@-1160.43,954.91 ccw(c-1170.28,955) -1160.43,955 ccw(c-1150.59,955) v1@-1160.43,954.91 ; v1@-1160.43,954.91 ccw(c-1150.59,955) -1140.75,954.92 ; -1140.75,941.78 ccw(c-1121.06,947.5) -1121.06,927 ccw(c-1121.06,947.5) -1101.38,941.78 ; -1140.75,941.78 cw(c-1121.06,947.5) -1140.75,953.22 -1140.75,954.92 ; v1@-1081.69,954.91 ccw(c-1091.53,955) -1081.69,955 ccw(c-1071.85,955) v1@-1081.69,954.91 ; v1@-1081.69,954.91 ccw(c-1071.85,955) -1062.01,954.88
  Top Layer w15: v1(-757.5,220) U9.5@-729,220 ; v1(-757.5,350) U6.5@-729,350 ; v1(-757.5,480) U5.5@-729,480 ; v1(-757.5,590) U3.5@-729,590 ; v1(-757.5,700) U1.5@-729,700 ; U7.5@-526,350 v1(-497.5,350) ; U4.5@-526,590 v1(-497.5,590) ; U2.5@-526,700 v1(-497.5,700) ; v1(-325.59,-21) Q1_QLA1.4@-325.59,6 ; Q1_QLA1.1@-274.41,84 v1(-274.41,111) ; U10.5@885,-76 v1(885,-47.5) ; U8.5@990,14 v1(990,42.5)
  Top Layer w18: pad.2@-1250,-595 v1(-1195,-595) ; C5.1@-781,480 v1(-757.5,480) ; C9.1@-779,220 v1(-757.5,220) ; C6.1@-779,350 v1(-757.5,350) ; C3.1@-779,590 v1(-757.5,590) ; C1.1@-779,700 v1(-757.5,700) ; C11.1@-580,474 v1(-555,474) ; C11.1@-580,506 v1(-555,506) ; v1(-497.5,350) C7.1@-476,350 ; v1(-497.5,590) C4.1@-476,590 ; v1(-497.5,700) C2.1@-476,700 ; v1(885,-47.5) C10.1@885,-25 ; v1(969.5,-162.5) C12_QLA1.1@969.5,-137.5 ; v1(990,42.5) C8.1@990,64 ; v1(1001.5,-162.5) C12_QLA1.1@1001.5,-137.5 ; C13_QLA1.1@1074.58,-129.84 1074.89,-130.16 v1(1099,-130.16) ; v1(9549.5,-97.5) C12_QLA2.1@9549.5,-72.5 ; v1(9581.5,-97.5) C12_QLA2.1@9581.5,-72.5 ; C13_QLA2.1@9654.58,-64.84 9654.89,-65.16 v1(9679,-65.16)
  Top Layer w20: R33_QLA1.2@275,-70 v1(275,-42.46) ; R33_QLA2.2@8665,-70 v1(8665,-42.46)
  Top Layer w60: J1_QLA2.40@6500.63,-669.29 J1_QLA2.39@6579.37,-669.29
  Signal 1 w18: -525.78,590 v1(-497.5,590) ; -525.78,700 v1(-497.5,700) ; -517.5,570 v1(-497.5,590) ; -517.5,610 v1(-497.5,590) ; -517.5,680 v1(-497.5,700) ; -517.5,720 v1(-497.5,700)
  Signal 1 w20: 697.54,-880.04 705,-887.5 ; 1690,-980 1737.38,-980 cw(c1825,-1025) 1825,-926.5 ; 1695,-965 1742.38,-965 ; 1710,-950 1757.38,-950 ; 1715,-940 1762.38,-940 ; 8887.46,-661.75 8895,-669.29 ; 9505,-669.29 9505,-239.16
  Signal 1 w75: 1733.23,-887.5 1745,-899.27 1890.5,-899.27 ; 1963,-826.77 cw(c1890.5,-826.77) 1890.5,-899.27 ; 1987.5,-839.27 cw(c1927.5,-839.27) 1927.5,-899.27 1890.5,-899.27
  Signal 1 w80: J1_QLA1.40@-1889.37,-669.29 J1_QLA1.39@-1810.63,-669.29 -1746.97,-669.29 ; 6436.97,-669.29 J1_QLA2.40@6500.63,-669.29 J1_QLA2.39@6579.37,-669.29 6643.03,-669.29
  Signal 1 w100: -1746.97,-669.29 -1210.71,-669.29 ; 705,-887.5 1733.23,-887.5 1357.86,-512.14 ; 1975,-840 cw(c2175,-840) 2033.58,-698.58 2188.58,-543.58 cw(c2330,-685) 2330,-485 6060,-485 cw(c6060,-685) 6201.42,-543.58 6327.13,-669.29 6436.97,-669.29 ; 6643.03,-669.29 8895,-669.29 9505,-669.29
  other v1: 7981,-31 8069,47 -1160.43,902.5 -1121.06,902.5 -1081.69,902.5 -1180.12,925 -1140.75,925 -1062.01,925
pads on no net: J3.51 J3.52 J4.51 J4.52 U11_QLA1.11 U11_QLA1.20 U11_QLA1.31 U11_QLA2.11 U11_QLA2.20 U11_QLA2.31

## Polygon pours and split planes (outlines as drawn)
VCC3 on Signal 1 "VCC3-POUR-Q1" (hatched Vertical grid 9.5 track 10, remove dead copper, pour order 1): -1705,-985 1705,-985 1705,-825 1470,-590 1470,-85 1110,275 -440,275 -490,325 -490,910 -650,910 -650,1050 -1705,1050
VCC3 on Signal 1 "VCC3-POUR-Q2" (hatched Vertical grid 9.5 track 10, pour order 0): 6685,-930 10095,-930 10095,930 6685,930
GND on Signal 2 "GND-POUR-Q1" (hatched Vertical grid 9.5 track 10, remove dead copper, pour order 3): 1825,-1155 ccw(c1825,-1025) 1955,-1025 1955,-875 1705,-875 1705,875 1955,875 1955,1025 ccw(c1825,1025) 1825,1155 -1825,1155 ccw(c-1825,1025) -1955,1025 -1955,875 -1705,875 -1705,-875 -1955,-875 -1955,-1025 ccw(c-1825,-1025) -1825,-1155
GND on Signal 2 "GND-POUR-Q2" (hatched Vertical grid 9.5 track 10, remove dead copper, pour order 2): 10215,-1155 ccw(c10215,-1025) 10345,-1025 10345,-875 10095,-875 10095,875 10345,875 10345,1025 ccw(c10215,1025) 10215,1155 6565,1155 ccw(c6565,1025) 6435,1025 6435,875 6685,875 6685,-875 6435,-875 6435,-1025 ccw(c6565,-1025) 6565,-1155
GND on Plane 1 (split plane): 656 vertices, not listed, extent -1979.97,-1179.97 10369.97,1179.97
GND on Plane 2 (split plane): 656 vertices, not listed, extent -1979.97,-1179.97 10369.97,1179.97

## Other copper
Top Layer:
  rectangle net VCC3: 8050.59,38 8069,56
  region net VCC3: 7999.41,-22 7981,-22 7981,-40 7999.41,-40
  rectangle net VCC3: -1183.62,893.5 -1058.51,930
  rectangle net VCC3: -1101.38,925 -1062.52,945
  rectangle net VCC3: -1180.12,925 -1140.75,941.78
  rectangle net VCC: -1337.6,925 -1298.23,941.78
  rectangle net VCC: -1258.86,925 -1220,945
  rectangle net VCC: -1341.1,893.5 -1215.99,930
Signal 1:
  rectangle net GND: 1460,760 1710,1080
  rectangle net GND: 1695,945 1825,1085
  rectangle net GND: 6575,945 10205,1160
  rectangle net GND: 6485,1025 6645,1070
  region net GND: 10295,1070 10135,1070 10135,1025 10295,1025
  rectangle net GND: 6575,-1160 10205,-945
  rectangle net GND: 6485,-1070 6645,-1025
  region net GND: 10295,-1025 10135,-1025 10135,-1070 10295,-1070
  rectangle net GND: -1815,-1160 1815,-1000
  rectangle net GND: -1905,-1070 -1745,-1025
  region net GND: 1905,-1025 1745,-1025 1745,-1070 1905,-1070
  region net GND: 1905,1070 1745,1070 1745,1025 1905,1025
  rectangle net GND: -1905,1025 -1745,1070
  rectangle net GND: -1815,1065 1815,1160
  region net VCC3: -1062.01,953.22 -1101.38,953.22 -1101.38,910 -1062.01,910
  region net VCC3: -1140.75,953.23 -1180.12,953.23 -1180.12,910 -1140.75,910
Signal 2:
  rectangle net VCC: -1535,-870 -1280,-775
  pour cut-out: -740,165 -860,165 -860,755 -790,755 -740,705
  pour cut-out: 9495,-185 9495,-95 9475,-95 9475,-185
  pour cut-out: 904.04,183.18 981.82,260.96 995.96,246.82 918.18,169.04
  pour cut-out: 1330,-280 1440,-280 1440,-300 1330,-300
  pour cut-out: 10060,430 10030,460 9975,460 9975,-35 10045,-105 10060,-105
  pour cut-out: 8095,95 8095,-365 8415,-365 8415,95
Bottom Layer:
  rectangle net VCC: -1385,967.15 -1219.49,1025
  rectangle net VCC: -1575,915 -1377.78,1025
  rectangle net VCC: -1385,915 -1368,935
  rectangle net VCC: -1258.86,910 -1219.49,953.23
  rectangle net VCC: -1337.6,910 -1298.23,953.22
  rectangle net VCC: -1575,-748.03 -1210,925
Plane 1 (plane layer: these items are gaps in the copper):
  rectangle: -1101.38,915 -1062.01,935
  rectangle: -1180.12,915 -1140.75,935
  rectangle: -1258.86,915 -1219.49,935
  rectangle: -1337.6,915 -1298.23,935
Plane 2 (plane layer: these items are gaps in the copper):
  rectangle: -1101.38,915 -1062.01,935
  rectangle: -1180.12,915 -1140.75,935
  rectangle: -1258.86,915 -1219.49,935
  rectangle: -1337.6,915 -1298.23,935

## Silkscreen, mask and mechanical layers (free items; w line width, h text height)
Top Overlay:
  drawing of 329 lines, arcs and shapes, not listed
  text "1" at -1762.67,790.58 h120
  text "1" at 1937.33,790.58 h120
  text "1" at 6627.33,790.58 h120
  text "1" at 10317.33,790.58 h120
  text "R9-1" at -1644,730.04 h36
  text "R9-2" at 6746,730.04 h36
  text "5" at -1765,645.72 h80
  text "5" at 1935,645.72 h80
  text "5" at 6625,645.72 h80
  text "5" at 10325,645.72 h80
  text "10" at -1986.48,493.79 h60
  text "10" at 6403.52,493.79 h60
  text "10" at 1689.56,487.74 h80
  text "10" at 10079.56,487.74 h80
  text "R20-1" at 1486,415.08 h36
  text "R20-2" at 9871,415.08 h36
  text "R21-1" at 1486,336.34 h36
  text "R21-2" at 9871,336.34 h36
  text "R10-1" at -1644,319.47 h36
  text "R11-1" at -1644,265.1 h36
  text "R22-1" at 1486,257.6 h36
  text "R22-2" at 9871,257.6 h36
  text "15" at 10320,257.9 h60
  text "15" at 1935,251.97 h80
  text "15" at 6625,251.97 h80
  text "R12-1" at -1644,210.73 h36
  text "R23-1" at 1486,178.86 h36
  text "R23-2" at 9871,178.86 h36
  text "R13-1" at -1644,156.36 h36
  text "R34-1" at 1186,142.01 h36
  text "RN2-1" at -507.97,122.01 h36
  text "RN2-2" at 7806.03,102.01 h36
  text "20" at -1987.56,100.09 h60
  text "R24-1" at 1486,100.12 h36
  text "R24-2" at 9871,100.12 h36
  text "20" at 6402.44,94.98 h60
  text "C13-1" at 1186,82.01 h36
  text "U11-2" at 9662.03,82.01 h36
  text "Q1-1" at -241.98,62.01 h36
  text "R10-2" at 5866,42.01 h36
  text "Q1-2" at 8092.02,32.01 h36
  text "U11-1" at 1188.02,22.01 h36
  text "C13-2" at 9347.05,22.01 h36
  text "R25-1" at 1486,21.38 h36
  text "R11-2" at 5866,-12.99 h36
  text "R34-2" at 9341.05,-37.99 h36
  text "DQLA-Q" at 4016.85,-45.17 h125
  text "R26-1" at 1486,-57.36 h36
  text "R12-2" at 5866,-67.99 h36
  text "R13-2" at 5866,-122.99 h36
  text "25" at -1765,-131.03 h80
  text "C12-2" at 9347.05,-132.99 h36
  text "R27-1" at 1486,-136.1 h36
  text "25" at 10320,-136.1 h60
  text "25" at 1935,-142.14 h80
  text "25" at 6625,-142.14 h80
  text "R14-1" at -1644,-152.97 h36
  text "R31-1" at -224,-152.99 h36
  text "R32-1" at 51,-152.99 h36
  text "R33-1" at 326,-152.99 h36
  text "R31-2" at 8161,-152.99 h36
  text "R32-2" at 8436,-152.99 h36
  text "R33-2" at 8711,-152.99 h36
  text "(" at 3428.18,-179.04 h140
  text "(" at 4962.27,-179.04 h140
  text "DQLA Dual QLA Interface Board" at 3474.49,-181.32 h125
  text "R14-2" at 6171,-190.99 h36
  text "R15-1" at -1644,-207.34 h36
  text "D1-1" at -224,-217.99 h36
  text "D2-1" at 51,-217.99 h36
  text "D3-1" at 326,-217.99 h36
  text "D1-2" at 8161,-217.99 h36
  text "D2-2" at 8436,-217.99 h36
  text "D3-2" at 8711,-217.99 h36
  text "R30-2" at 9341.05,-242.99 h36
  text "R15-2" at 6171,-245.99 h36
  text "C12-1" at 967.01,-256 h36 r270
  text "R16-1" at -1644,-261.71 h36
  text "R30-1" at 1037.01,-267.03 h36 r270
  text "30" at -1988.72,-293.61 h60
  text "Rev 1.1 (January 2023)" at 3856.25,-295.15 h80
  text "30" at 1686.56,-299.66 h80
  text "30" at 10076.56,-299.66 h80
  text "R16-2" at 6171,-300.99 h36
  text "R25-2" at 9536,-312.99 h36
  text "R17-1" at -1644,-316.08 h36
  text "R17-2" at 6171,-355.99 h36
  text "R26-2" at 9536,-367.99 h36
  text "Relay" at 238.15,-388.48 h80
  text "Relay" at 8628.15,-395.98 h80
  text "MV-Fault" at -491.48,-399.64 h80
  text "V-Fault" at -103.56,-399.64 h80
  text "R18-1" at -1644,-404.2 h36
  text "R28-1" at 1486,-404.2 h36
  text "R28-2" at 9871,-404.2 h36
  text "MV-Fault" at 7898.52,-407.14 h80
  text "V-Fault" at 8286.44,-407.14 h80
  text "©" at 3705.55,-417.94 h100
  text "2023 Johns Hopkins University" at 3790.98,-420.15 h80
  text "R27-2" at 9536,-422.99 h36
  text "R18-2" at 6171,-444.99 h36
  text "R19-1" at -1644,-458.57 h36
  text "R29-1" at 1486,-458.57 h36
  text "R29-2" at 9871,-458.57 h36
  text "R19-2" at 6171,-499.99 h36
  text "35" at 10320,-529.83 h60
  text "35" at -1765,-535.88 h80
  text "35" at 1935,-535.88 h80
  text "35" at 6625,-535.88 h80
  text "3.3V" at -1185,-619.07 h80
  text "QLA #1" at -228.53,-633.24 h150
  text "QLA #2" at 8159.45,-633.24 h150
  text "40" at -1990.14,-687.31 h60
  text "40" at 1684.67,-693.36 h80
  text "40" at 6374.67,-693.36 h80
  text "40" at 10074.67,-693.36 h80
  text "5.0V" at -1185,-774.07 h80
  text "J1-1" at -1763.83,-854.73 h100
  text "J2-1" at 1606.17,-855.26 h100
  text "J1-2" at 6634.65,-855.26 h100
  text "J2-2" at 9984.65,-855.26 h100
  text "GND" at -760,-859.03 h80
  text "QLA  HEATSINK" at 487.29,-1018.24 h150
  text "QLA  HEATSINK" at 8877.29,-1018.24 h150
Bottom Overlay:
  text "J1-1" at -1725,-29.99 h60
  text "J2-1" at 1535,-29.99 h60
  text "J1-2" at 6665,-29.99 h60
  text "J2-2" at 9895,-29.99 h60
Mechanical 1:
  the board outline again, w5

## Text inside footprints (layer, text, board x,y; h text height)
J3: Top Overlay "50" at -1450,940 h75; Top Overlay "1" at -375,940 h75
J4: Top Overlay "1" at 1380,940 h75; Top Overlay "50" at 300,940 h75